# EAGLE board receiver_F_pcb (EAGLE 6.1)
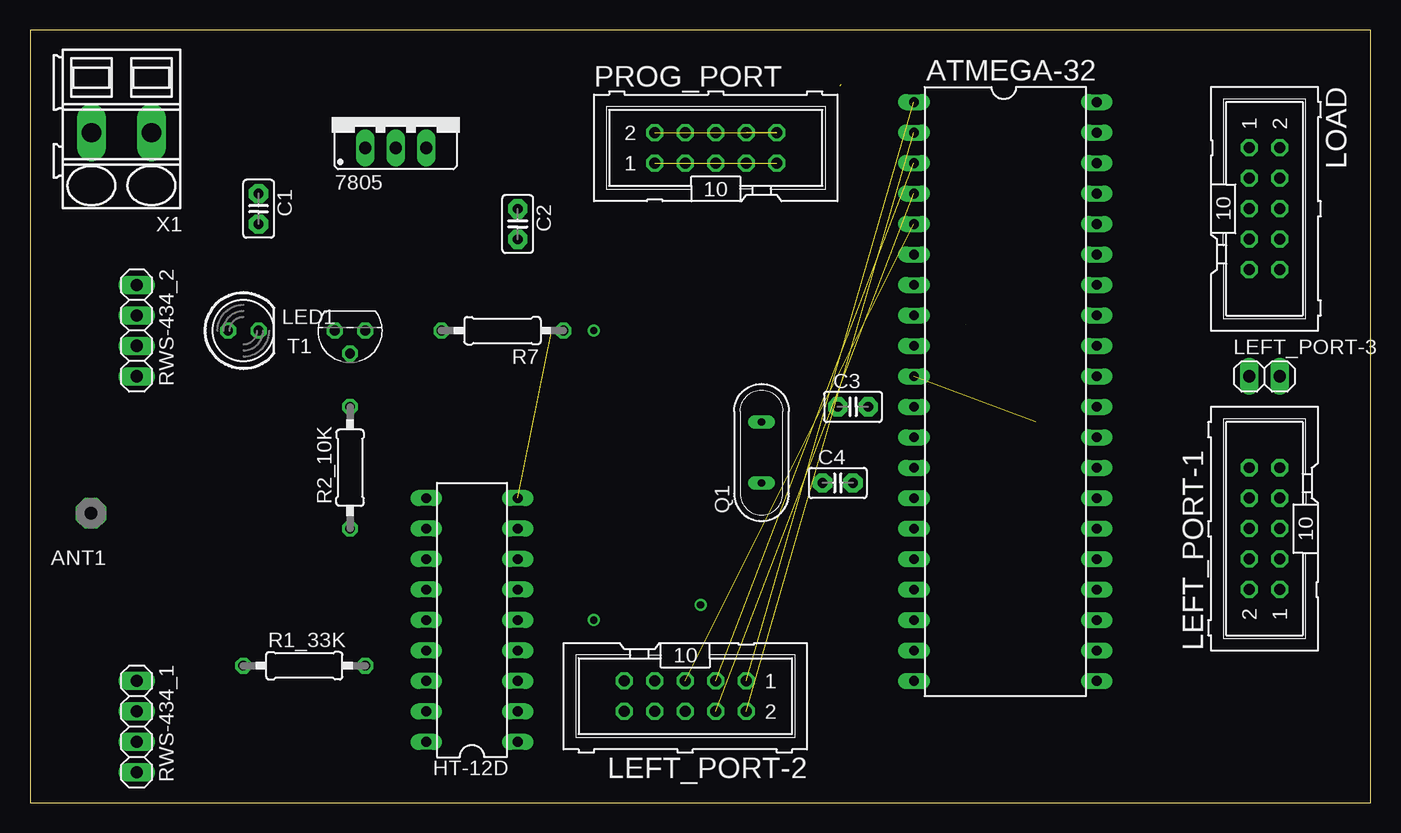
[diagram p0: board, top side]
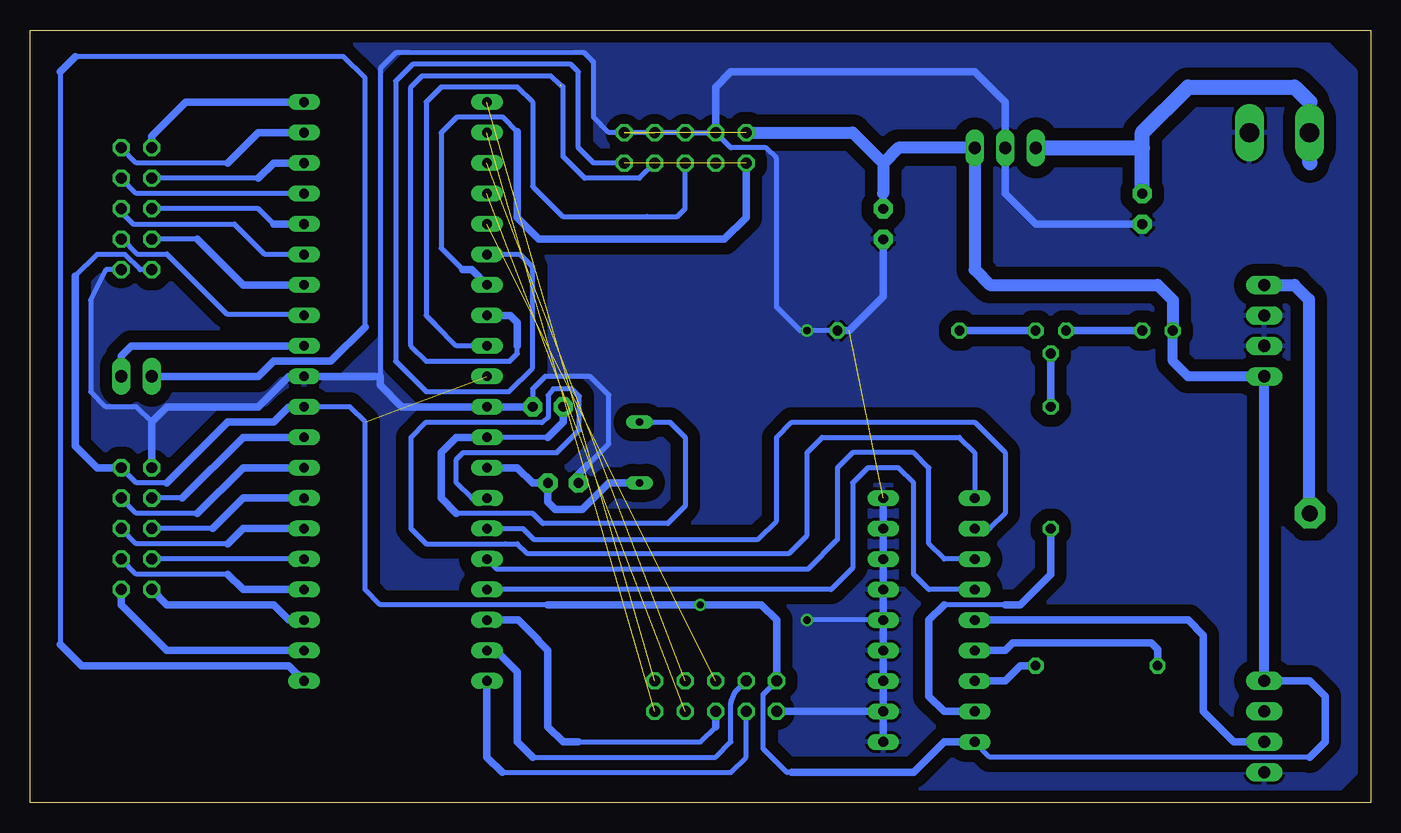
[diagram p1: board, bottom side, seen from below]

Size 111.74 x 64.44 mm. Coordinates in mm from the lower left corner, seen from the top.
Outline: 0,0 111.74,0 111.74,64.44 0,64.44 0,0
Copper layers (1*16): Top 0.035mm / dielectric 1.5mm / Bottom 0.035mm
Design rules: minimum track width 10mil, minimum drill 24mil, track to track 8mil, track to pad 8mil, pad to pad 8mil, via to via 8mil, smd to smd 8mil, copper to edge 40mil, drill to drill 8mil, minimum pad ring 10mil, minimum via ring 8mil, stop-mask expansion 4mil, vias tented up to drill 0mil, thermal gap 10mil

## Footprints (pad centres in the part's own frame; a part is rotated, then mirrored left to right if it is on the bottom)
78XXS = drill 1.016 long: GND 0,-2.54; IN -2.54,-2.54; OUT 2.54,-2.54
PAD-01 = drill 1.321 pad 2.54 octagon: 1 0,0
DIL40 = drill 0.813 long: 1 -24.13,-7.62; 2 -21.59,-7.62; 3 -19.05,-7.62; 4 -16.51,-7.62; 5 -13.97,-7.62; 6 -11.43,-7.62; 7 -8.89,-7.62; 8 -6.35,-7.62; 9 -3.81,-7.62; 10 -1.27,-7.62; 11 1.27,-7.62; 12 3.81,-7.62; 13 6.35,-7.62; 14 8.89,-7.62; 15 11.43,-7.62; 16 13.97,-7.62; 17 16.51,-7.62; 18 19.05,-7.62; 19 21.59,-7.62; 20 24.13,-7.62; 21 24.13,7.62; 22 21.59,7.62; 23 19.05,7.62; 24 16.51,7.62; 25 13.97,7.62; 26 11.43,7.62; 27 8.89,7.62; 28 6.35,7.62; 29 3.81,7.62; 30 1.27,7.62; 31 -1.27,7.62; 32 -3.81,7.62; 33 -6.35,7.62; 34 -8.89,7.62; 35 -11.43,7.62; 36 -13.97,7.62; 37 -16.51,7.62; 38 -19.05,7.62; 39 -21.59,7.62; 40 -24.13,7.62
C2.5-2 = drill 0.813 pad 1.6 octagon: 1 -1.27,0; 2 1.27,0
DIL18 = drill 0.813 long: 1 -10.16,-3.81; 2 -7.62,-3.81; 3 -5.08,-3.81; 4 -2.54,-3.81; 5 0,-3.81; 6 2.54,-3.81; 7 5.08,-3.81; 8 7.62,-3.81; 9 10.16,-3.81; 10 10.16,3.81; 11 7.62,3.81; 12 5.08,3.81; 13 2.54,3.81; 14 0,3.81; 15 -2.54,3.81; 16 -5.08,3.81; 17 -7.62,3.81; 18 -10.16,3.81
LED5MM = drill 0.813 octagon: A -1.27,0; K 1.27,0
ML10 = drill 0.914 octagon: 1 -5.08,-1.27; 2 -5.08,1.27; 3 -2.54,-1.27; 4 -2.54,1.27; 5 0,-1.27; 6 0,1.27; 7 2.54,-1.27; 8 2.54,1.27; 9 5.08,-1.27; 10 5.08,1.27
1X02 = drill 1.016 long: 1 -1.27,0; 2 1.27,0
QS = drill 0.61 long: 1 -2.54,0; 2 2.54,0
0207/10 = drill 0.813 octagon: 1 -5.08,0; 2 5.08,0
1X04 = drill 1.016 long: 1 -3.81,0; 2 -1.27,0; 3 1.27,0; 4 3.81,0
TO92 = drill 0.813 octagon: 1 1.27,0; 2 0,1.905; 3 -1.27,0
SMKDSP_1,5/2 = drill 1.6 pad 1.8 long: 1 -2.5,0; 2 2.5,0

## Placement (x,y rotation side)
7805  [78XXS]  30.48,57.15 0 top
ANT1  [PAD-01]  5.08,24.13 180 top
ATMEGA-32  [DIL40]  81.28,34.29 270 top
C1  0.33uF  [C2.5-2]  19.05,49.53 270 top
C2  0.1uF  [C2.5-2]  40.64,48.26 270 top
C3  22pF  [C2.5-2]  68.58,33.02 0 top
C4  22pF  [C2.5-2]  67.31,26.67 0 top
HT-12D  [DIL18]  36.83,15.24 90 top
LED1  [LED5MM]  17.78,39.37 0 top
LEFT_PORT-1  [ML10]  102.87,22.86 90 top
LEFT_PORT-2  [ML10]  54.61,8.89 180 top
LEFT_PORT-3  [1X02]  102.87,35.56 0 top
LOAD  [ML10]  102.87,49.53 270 top
PROG_PORT  [ML10]  57.15,54.61 0 top
Q1  [QS]  60.96,29.21 90 top
R1_33K  [0207/10]  22.86,11.43 0 top
R2_10K  [0207/10]  26.67,27.94 90 top
R7  470  [0207/10]  39.37,39.37 180 top
RWS-434_1  [1X04]  8.89,6.35 270 top
RWS-434_2  [1X04]  8.89,39.37 270 top
T1  2N3904  [TO92]  26.67,39.37 180 top
X1  SMKDSP_1,5/2  [SMKDSP_1,5/2]  7.62,55.88 180 top

## Library data of the parts
7805 = v-reg
ANT1 = discrete
ATMEGA-32 HT-12D = ic-package
C1-C4 = capacitor-wima
LED1 = led
LEFT_PORT-1 LEFT_PORT-2 LOAD PROG_PORT = con-harting-ml; OC_FARNELL: unknown; OC_NEWARK: unknown
LEFT_PORT-3 RWS-434_1 RWS-434_2 = pinhead
Q1 = special
R1_33K R2_10K R7 = rcl
T1 = transistor
X1 = con-phoenix-smkdsp; MF: FARNELL; MPN: 1733570; OC_FARNELL: 3041244; OC_NEWARK: 69C8588

## Nets
GND1: 7805.GND ATMEGA-32.11 ATMEGA-32.31 C1.2 C2.2 C3.2 C4.1 HT-12D.1 HT-12D.2 HT-12D.3 HT-12D.4 HT-12D.5 HT-12D.6 HT-12D.7 HT-12D.8 HT-12D.9 LEFT_PORT-1.10 LEFT_PORT-2.10 LOAD.10 PROG_PORT.4 PROG_PORT.6 PROG_PORT.8 PROG_PORT.10 R7.1 RWS-434_1.4 RWS-434_2.2 RWS-434_2.3 X1.1
N$1: HT-12D.17 R2_10K.1
N$2: R2_10K.2 T1.2
N$3: 7805.IN C1.1 X1.2
N$4: R7.2 T1.3
N$5: ANT1.1 RWS-434_2.1
N$6: LED1.K T1.1
N$7: HT-12D.14 RWS-434_1.3
N$8: HT-12D.15 R1_33K.1
N$9: HT-12D.16 R1_33K.2
N$10: ATMEGA-32.12 C3.1 Q1.2
N$11: ATMEGA-32.13 C4.2 Q1.1
N$12: ATMEGA-32.22 LEFT_PORT-1.1
N$13: ATMEGA-32.23 LEFT_PORT-1.2
N$14: ATMEGA-32.9 PROG_PORT.5
N$15: ATMEGA-32.24 LEFT_PORT-1.3
N$16: ATMEGA-32.6 PROG_PORT.9
N$17: ATMEGA-32.8 PROG_PORT.7
N$18: ATMEGA-32.7 PROG_PORT.1
N$19: ATMEGA-32.14 HT-12D.10
N$20: ATMEGA-32.15 HT-12D.11
N$21: ATMEGA-32.16 HT-12D.12
N$22: ATMEGA-32.17 HT-12D.13
N$23: ATMEGA-32.25 LEFT_PORT-1.4
N$24: ATMEGA-32.40 LOAD.1
N$25: ATMEGA-32.39 LOAD.2
N$26: ATMEGA-32.38 LOAD.3
N$27: ATMEGA-32.37 LOAD.4
N$28: ATMEGA-32.36 LOAD.5
N$29: ATMEGA-32.35 LOAD.6
N$30: ATMEGA-32.34 LOAD.7
N$31: ATMEGA-32.33 LOAD.8
N$32: ATMEGA-32.26 LEFT_PORT-1.5
N$33: ATMEGA-32.27 LEFT_PORT-1.6
N$34: ATMEGA-32.28 LEFT_PORT-1.7
N$35: ATMEGA-32.29 LEFT_PORT-1.8
N$36: ATMEGA-32.21 LEFT_PORT-3.1
N$37: ATMEGA-32.32 LEFT_PORT-3.2
N$38: ATMEGA-32.1 LEFT_PORT-2.1
N$39: ATMEGA-32.2 LEFT_PORT-2.2
N$40: ATMEGA-32.3 LEFT_PORT-2.3
N$41: ATMEGA-32.4 LEFT_PORT-2.4
N$42: ATMEGA-32.5 LEFT_PORT-2.5
N$43: ATMEGA-32.18 LEFT_PORT-2.6
N$44: ATMEGA-32.19 LEFT_PORT-2.7
N$45: ATMEGA-32.20 LEFT_PORT-2.8
VCC: 7805.OUT ATMEGA-32.10 ATMEGA-32.30 C2.1 HT-12D.18 LED1.A LEFT_PORT-1.9 LEFT_PORT-2.9 LOAD.9 PROG_PORT.2 RWS-434_1.1 RWS-434_2.4

## Tracks (layer width: path | path; a pad name or v marks a point on that pad's centre or on a via)
GND1  (via drill 0.6)  (2 unrouted)
  Bottom 0.406: R7.1 v46.99,39.37 47.57,39.37 49.53,41.33 49.53,53.73 50.41,54.61 53.34,54.61 PROG_PORT.4 PROG_PORT.6 PROG_PORT.10 63.5,55.88 64.77,57.15 64.77,61.77 65.55,62.54 81.24,62.54 82.55,61.24 82.55,35.56 | LOAD.10 105.41,44.45 106.68,41.91 106.68,34.29 105.41,33.02 102.87,33.02 101.6,31.75 | 65.48,27.94 65.26,28.16 63.5,29.92 63.5,34 65.06,35.56 68.81,35.56 69.85,34.52 C3.2 | HT-12D.9 HT-12D.5 | 40.64,11.43 HT-12D.5 | HT-12D.5 v46.99,15.24
  Bottom 0.61: C1.2 27.94,48.26 30.48,50.8 7805.GND 30.48,58.42 33.02,60.96 53.34,60.96 54.61,59.69 PROG_PORT.4 | C2.2 40.64,42.21 43.48,39.37 R7.1 | HT-12D.2 LEFT_PORT-2.10 | HT-12D.1 HT-12D.2 | HT-12D.2 HT-12D.3 40.64,11.43 HT-12D.4 HT-12D.5 HT-12D.6 HT-12D.7 HT-12D.8 HT-12D.9 | LEFT_PORT-1.10 101.6,31.75 100.33,33.02 92.71,33.02 90.17,35.56 ATMEGA-32.31 82.55,35.56 82.55,34.82 80.75,33.02 ATMEGA-32.11 C3.2 | C4.1 66.04,27.38 65.26,28.16
  pour Bottom (isolate 1.016): 1.27,60.96 2.54,62.23 3.81,63.5 109.22,63.5 110.49,62.23 110.49,3.81 107.95,1.27 11.67,1.27 10.87,0.47 5.87,0.47 5.17,1.17 2.64,1.17 1.27,2.54
N$1
  Bottom 0.406: 30.48,16.51 35.56,16.51
  Bottom 0.61: 35.56,16.51 36.83,15.24 36.83,8.89 35.56,7.62 HT-12D.17 | 30.48,16.51 29.21,16.51 26.67,19.05 R2_10K.1
N$2
  Bottom 0.61: T1.2 R2_10K.2
N$3
  Bottom 1.016: 5.08,58.42 5.08,53.34
  Bottom 1.27: C1.1 19.05,54.61 | 19.05,54.61 19.05,55.88 15.24,59.69 6.35,59.69 5.08,58.42 | 5.08,53.34 X1.2 | 7805.IN 19.05,54.61
N$4
  Bottom 0.61: T1.3 R7.2
N$5
  Bottom 1.016: RWS-434_2.1 6.38,43.18 5.17,41.97 5.17,24.22 ANT1.1
N$6
  Bottom 0.61: LED1.K T1.1
N$7
  Bottom 0.61: RWS-434_1.3 11.43,5.08 13.97,7.62 13.97,13.97 15.24,15.24 HT-12D.14
N$8
  Bottom 0.61: R1_33K.1 17.78,12.8 18.32,13.34 29.84,13.34 30.48,12.7 HT-12D.15
N$9
  Bottom 0.61: R1_33K.2 29.21,11.43 30.48,10.16 HT-12D.16
N$10
  Bottom 0.406: 68.58,30.48 ATMEGA-32.12 | 76.2,24.13 69.85,24.13 69.01,23.29 58.59,23.29 57.15,24.73 57.15,30.48 58.42,31.75 Q1.2
  Bottom 0.61: C3.1 67.31,31.75 68.58,30.48 | 76.2,24.13 77.47,25.4 77.47,29.21 76.2,30.48 ATMEGA-32.12
N$11
  Bottom 0.61: Q1.1 63.5,26.67 65.7,24.47 67.97,24.47 68.58,25.08 C4.2 69.85,26.67 71.12,27.94 ATMEGA-32.13
N$12
  Bottom 0.61: ATMEGA-32.22 100.33,12.7 104.14,16.51 LEFT_PORT-1.1
N$13
  Bottom 0.61: ATMEGA-32.23 90.17,15.24 91.44,16.51 100.33,16.51 LEFT_PORT-1.2
N$14  (1 unrouted)
  Bottom 0.406: 77.98,39.88 78.74,40.64 78.74,58.42 77.47,59.69 71.12,59.69 69.85,58.42 69.85,51.4 67.34,48.88 60.34,48.88 57.8,48.88 57.15,49.53 PROG_PORT.5 | ATMEGA-32.9 76.2,38.1 77.97,39.87
N$15
  Bottom 0.406: 95.25,19.05 102.87,19.05 LEFT_PORT-1.3
  Bottom 0.61: ATMEGA-32.24 93.98,17.78 95.25,19.05
N$16
  Bottom 0.406: PROG_PORT.9 64.77,53.34 66.04,54.61 66.04,60.96 66.66,61.59 79.86,61.59 81.28,60.17 81.28,36.83 78.74,34.29 71.83,34.29 69.85,36.27 69.85,44.68 70.89,45.72 ATMEGA-32.6
N$17  (1 unrouted)
  Bottom 0.406: 71.12,38.1 71.12,37.46 71.75,36.83 78.74,36.83 80.01,38.1 80.01,59.69 79.07,60.63 68.33,60.63 67.6,59.9 67.57,59.87 | PROG_PORT.7 60.96,52.07 65.51,52.07 67.31,53.87 67.31,59.69 67.38,59.76 67.47,59.76
  Bottom 0.61: 71.12,38.1 71.12,40.05 71.71,40.64 ATMEGA-32.8
N$18
  Bottom 0.406: 71.12,55.98 72.3,57.15 76.19,57.15 77.47,55.87 77.47,46.25 75.67,44.45
  Bottom 0.61: PROG_PORT.1 52.07,48.79 53.87,46.99 69.32,46.99 71.12,48.79 71.12,55.98 | 75.67,44.45 74.93,44.45 ATMEGA-32.7
N$19
  Bottom 0.406: ATMEGA-32.14 74.93,25.4 76.2,26.67 76.2,28.64 75.64,29.2 67.83,29.2 65.96,31.07 65.96,33.88 66.58,34.51 68.14,34.51 68.57,33.98 68.57,32.11 69.08,31.7 78.8,31.7 80.01,30.48 80.01,22.86 78.74,21.59 72.1,21.59 71.12,21.59 70.32,20.81 48.48,20.81 46.99,22.3 46.99,29.21 45.72,30.48 34.29,30.48 33.02,29.21 HT-12D.10
N$20
  Bottom 0.406: HT-12D.11 31.75,22.86 30.48,24.13 30.48,29.21 33.02,31.75 48.26,31.75 49.53,30.48 49.53,23.52 51.08,21.97 69.77,21.97 70.66,22.86 ATMEGA-32.15
N$21
  Bottom 0.406: HT-12D.12 35.56,20.32 36.83,21.59 36.83,27.94 38.1,29.21 43.18,29.21 44.45,27.94 44.45,21.94 46.91,19.48 72.82,19.48 ATMEGA-32.16
N$22
  Bottom 0.406: HT-12D.13 36.83,17.78 38.1,19.05 38.1,26.67 39.37,27.94 41.91,27.94 43.18,26.67 43.18,19.58 44.98,17.78 ATMEGA-32.17
N$23
  Bottom 0.406: ATMEGA-32.25 LEFT_PORT-1.4
N$24
  Bottom 0.61: ATMEGA-32.40 98.76,58.42 101.6,55.58 LOAD.1
N$25
  Bottom 0.406: 95.25,53.34 102.87,53.34 LOAD.2
  Bottom 0.61: ATMEGA-32.39 92.71,55.88 95.25,53.34
N$26
  Bottom 0.406: 92.71,52.07 LOAD.3
  Bottom 0.61: ATMEGA-32.38 91.44,53.34 92.71,52.07
N$27
  Bottom 0.406: ATMEGA-32.37 102.87,50.8 LOAD.4
N$28
  Bottom 0.406: 91.44,48.26 92.71,49.53 LOAD.5
  Bottom 0.61: ATMEGA-32.36 91.44,48.26
N$29
  Bottom 0.406: LOAD.6 104.14,49.25 103.14,48.26 94.71,48.26 92.21,45.76 88.94,45.76 ATMEGA-32.35
N$30
  Bottom 0.406: 97.79,46.99 LOAD.7
  Bottom 0.61: ATMEGA-32.34 93.98,43.18 97.79,46.99
N$31
  Bottom 0.406: LOAD.8 104.06,46.99 102.83,45.76 100.33,45.76 95.33,40.76 89.02,40.76 ATMEGA-32.33
N$32
  Bottom 0.406: 95.25,21.59 102.87,21.59 LEFT_PORT-1.5
  Bottom 0.61: ATMEGA-32.26 93.98,22.86 95.25,21.59
N$33
  Bottom 0.406: 96.52,22.86 LEFT_PORT-1.6
  Bottom 0.61: ATMEGA-32.27 93.98,25.4 96.52,22.86
N$34
  Bottom 0.406: 97.79,24.13 102.87,24.13 LEFT_PORT-1.7
  Bottom 0.61: ATMEGA-32.28 93.98,27.94 97.79,24.13
N$35
  Bottom 0.406: 99.06,25.4 LEFT_PORT-1.8
  Bottom 0.61: ATMEGA-32.29 93.98,30.48 99.06,25.4
N$36
  Bottom 0.406: 83.82,39.67 83.82,60.43 85.62,62.23 107.95,62.23 | 109.22,60.96 109.22,13.23
  Bottom 0.61: LEFT_PORT-3.1 92.71,35.56 91.44,36.83 86.66,36.83 83.82,39.67 | 107.95,62.23 109.22,60.96 | 109.22,13.23 107.42,11.43 90.17,11.43 ATMEGA-32.21
N$37
  Bottom 0.61: ATMEGA-32.32 103.31,38.1 104.14,37.27 LEFT_PORT-3.2
N$38  (1 unrouted)
N$39  (1 unrouted)
N$40  (1 unrouted)
N$41  (1 unrouted)
N$42  (1 unrouted)
N$43
  Bottom 0.406: 66.04,5.08 55.88,5.08 54.61,6.35
  Bottom 0.61: 66.04,5.08 67.01,5.08 67.31,5.08 68.58,6.35 68.58,12.7 69.39,13.52 69.39,13.57 71.06,15.24 ATMEGA-32.18 | 54.61,6.35 LEFT_PORT-2.6
N$44
  Bottom 0.406: 69.85,3.81 54.61,3.81 53.34,5.08 53.34,8.26 53.3,8.46 52.97,9.26 LEFT_PORT-2.7
  Bottom 0.61: ATMEGA-32.19 72.92,12.7 71.12,10.9 71.12,5.08 69.85,3.81
N$45
  Bottom 0.406: 72.39,2.54 53.34,2.54 52.07,3.81 LEFT_PORT-2.8
  Bottom 0.61: ATMEGA-32.20 73.66,3.81 72.39,2.54
N$46  (via drill 0.6)
  other vias: 59.69,55.88 59.69,55.88 59.69,55.88 59.69,55.88 59.69,55.88
N$47  (via drill 0.6)  (4 unrouted)
  other vias: 52.07,55.88 54.61,55.88 57.15,55.88 59.69,55.88 62.23,55.88
N$48  (via drill 0.6)  (4 unrouted)
  other vias: 52.07,53.34 54.61,53.34 57.15,53.34 59.69,53.34 62.23,53.34
N$49  (via drill 0.6)
  other vias: 101.6,54.61
N$50  (via drill 0.6)
  other vias: 101.6,52.07
N$51  (via drill 0.6)
  other vias: 101.6,49.53
N$52  (via drill 0.6)
  other vias: 101.6,46.99
N$53  (via drill 0.6)
  other vias: 101.6,44.45
N$54  (via drill 0.6)
  other vias: 101.6,27.94
N$55  (via drill 0.6)
  other vias: 101.6,25.4
N$56  (via drill 0.6)
  other vias: 101.6,22.86
N$57  (via drill 0.6)
  other vias: 101.6,20.32
N$58  (via drill 0.6)
  other vias: 101.6,17.78
N$59  (via drill 0.6)
  other vias: 104.14,54.61
N$60  (via drill 0.6)
  other vias: 104.14,52.07
N$61  (via drill 0.6)
  other vias: 104.14,49.53
N$62  (via drill 0.6)
  other vias: 104.14,46.99
N$63  (via drill 0.6)
  other vias: 104.14,44.45
N$64  (via drill 0.6)
  other vias: 104.14,27.94
N$65  (via drill 0.6)
  other vias: 104.14,25.4
N$66  (via drill 0.6)
  other vias: 104.14,22.86
N$67  (via drill 0.6)
  other vias: 104.14,20.32
N$68  (via drill 0.6)
  other vias: 104.14,17.78
N$69  (via drill 0.6)
  other vias: 49.53,7.62
N$70  (via drill 0.6)
  other vias: 52.07,7.62
N$71  (via drill 0.6)
  other vias: 54.61,7.62
N$72  (via drill 0.6)
  other vias: 57.15,7.62
N$73  (via drill 0.6)
  other vias: 59.69,7.62
N$74  (via drill 0.6)
  other vias: 49.53,10.16
N$75  (via drill 0.6)
  other vias: 52.07,10.16
N$76  (via drill 0.6)
  other vias: 54.61,10.16
N$77  (via drill 0.6)
  other vias: 57.15,10.16
N$78  (via drill 0.6)
  other vias: 59.69,10.16
VCC  (via drill 0.6)  (1 unrouted)
  Bottom 0.406: LOAD.9 102.56,44.45 103.83,45.72 106.15,45.72 107.95,43.92 | 100.33,26.67 102.87,26.67 LEFT_PORT-1.9 | 48.26,2.54 48.68,2.54 50.65,4.51 50.65,9.05 LEFT_PORT-2.9 | 68.58,16.51 82.55,16.51 83.82,17.78 83.82,31.75 85.09,33.02 ATMEGA-32.30 | 5.08,3.81 31.75,3.81 HT-12D.18
  Bottom 0.61: HT-12D.18 35.56,5.08 38.1,2.54 48.26,2.54 | 107.95,43.92 107.95,29.74 106.15,27.94 LEFT_PORT-1.9 | ATMEGA-32.30 90.17,33.02 91.44,31.75 95.25,31.75 100.33,26.67 | 40.64,53.34 C2.1 | LEFT_PORT-2.9 49.53,15.24 50.8,16.51 v55.88,16.51 68.58,16.51 | RWS-434_1.1 5.08,10.16 3.81,8.89 3.81,5.08 5.08,3.81
  Bottom 0.813: RWS-434_1.1 RWS-434_2.4 15.24,35.56 16.51,36.83 LED1.A
  Bottom 1.016: PROG_PORT.2 43.18,55.88 40.64,53.34 | 40.64,53.34 40.64,50.8 | 40.64,53.34 39.37,54.61 7805.OUT 33.02,44.45 31.75,43.18 17.78,43.18 16.51,41.91 LED1.A